# Altium PCB VFan2.PcbDoc
Units mm, origin at the board's own origin, x right, y up, seen from the top; angles counter-clockwise.
Board outline 80 x 87 mm, 2 copper layers (Top Layer, Bottom Layer), stack 1.571 mm thick; 61 components, 41 nets, 210 pads, 277 vias.
Unrouted connection lines stored in the file: 2.
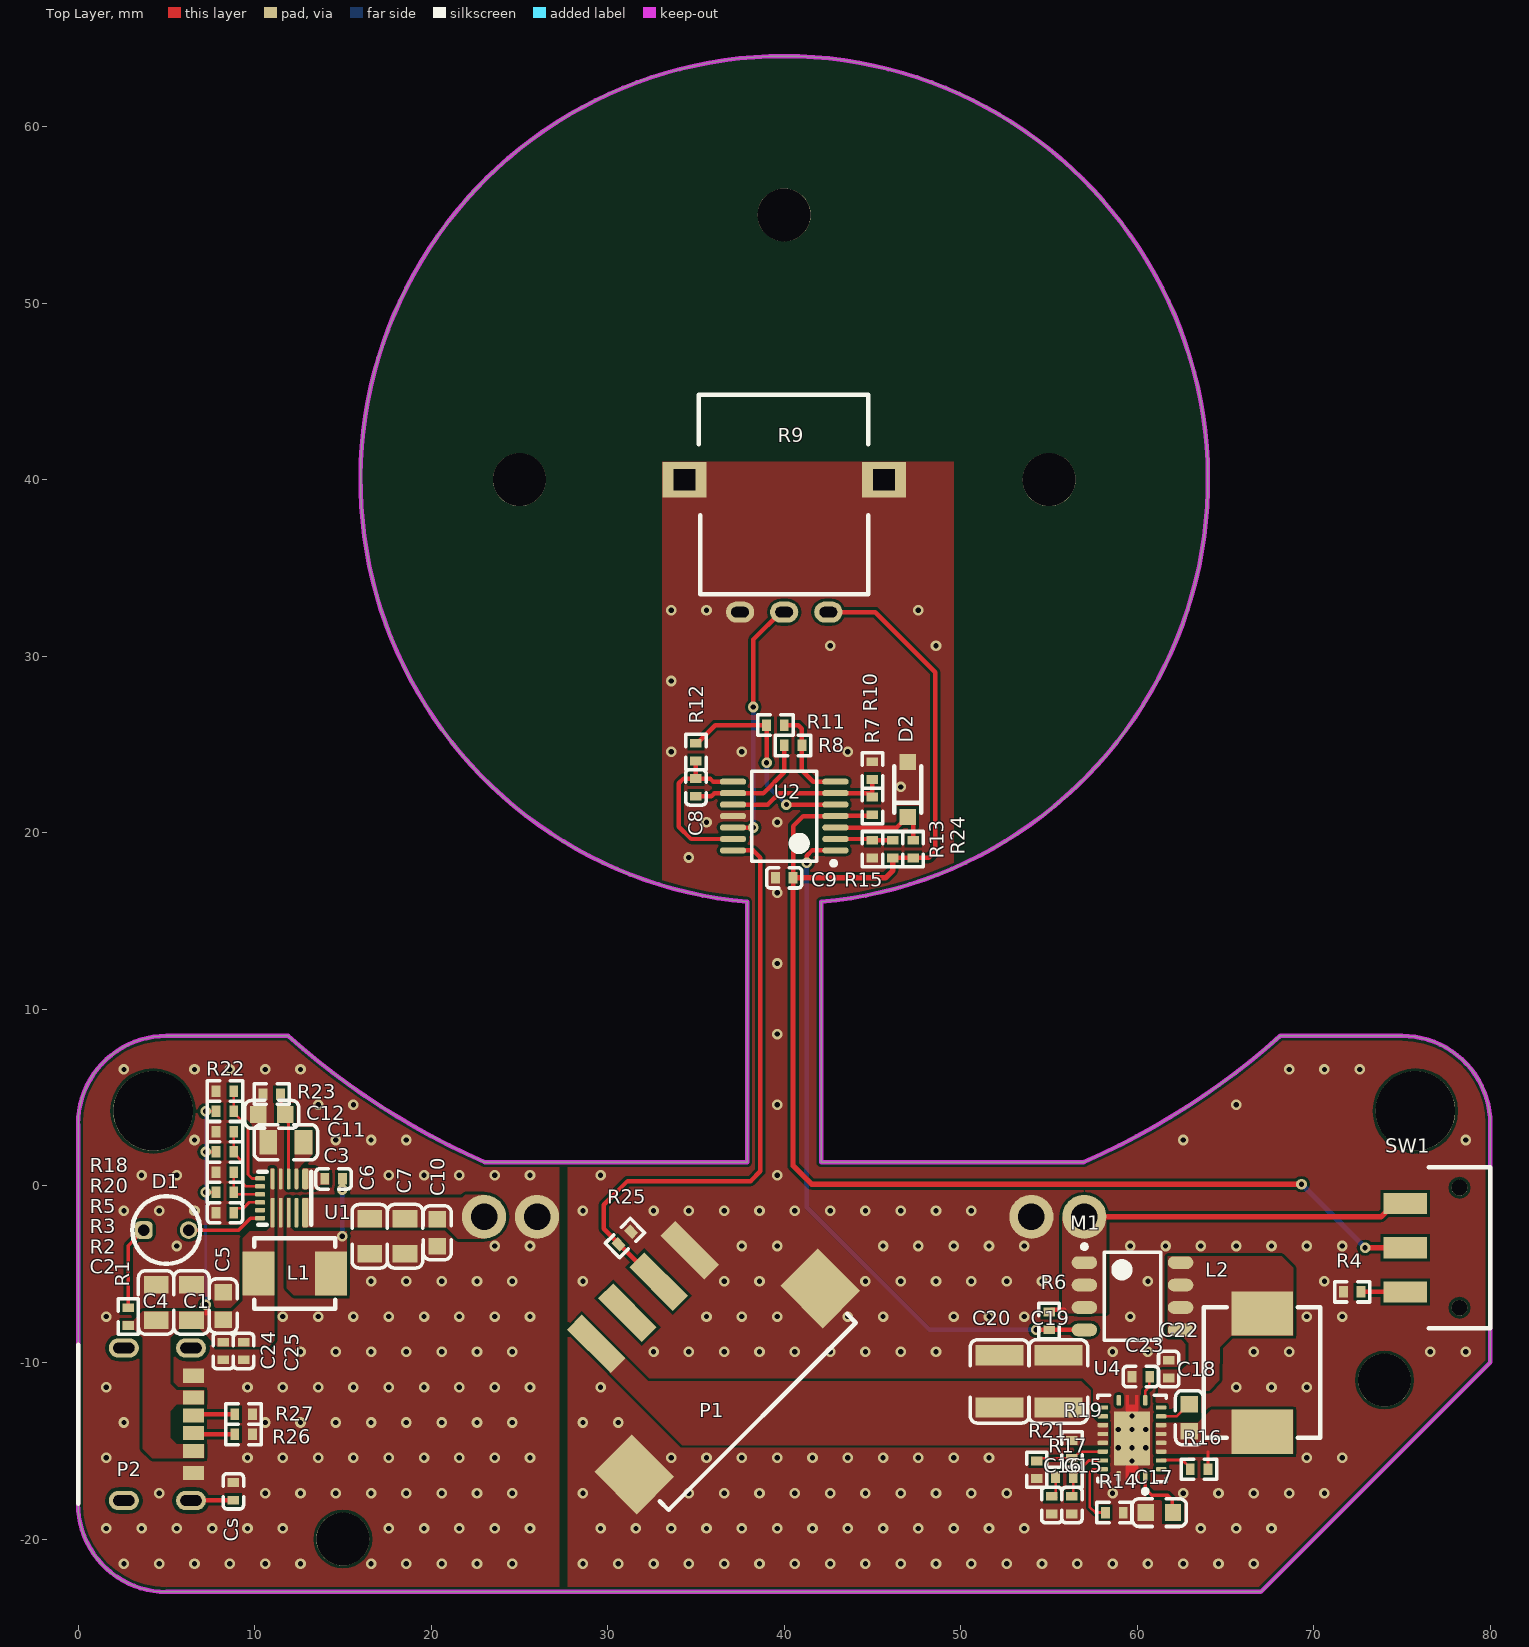
[diagram p0: Top Layer view]
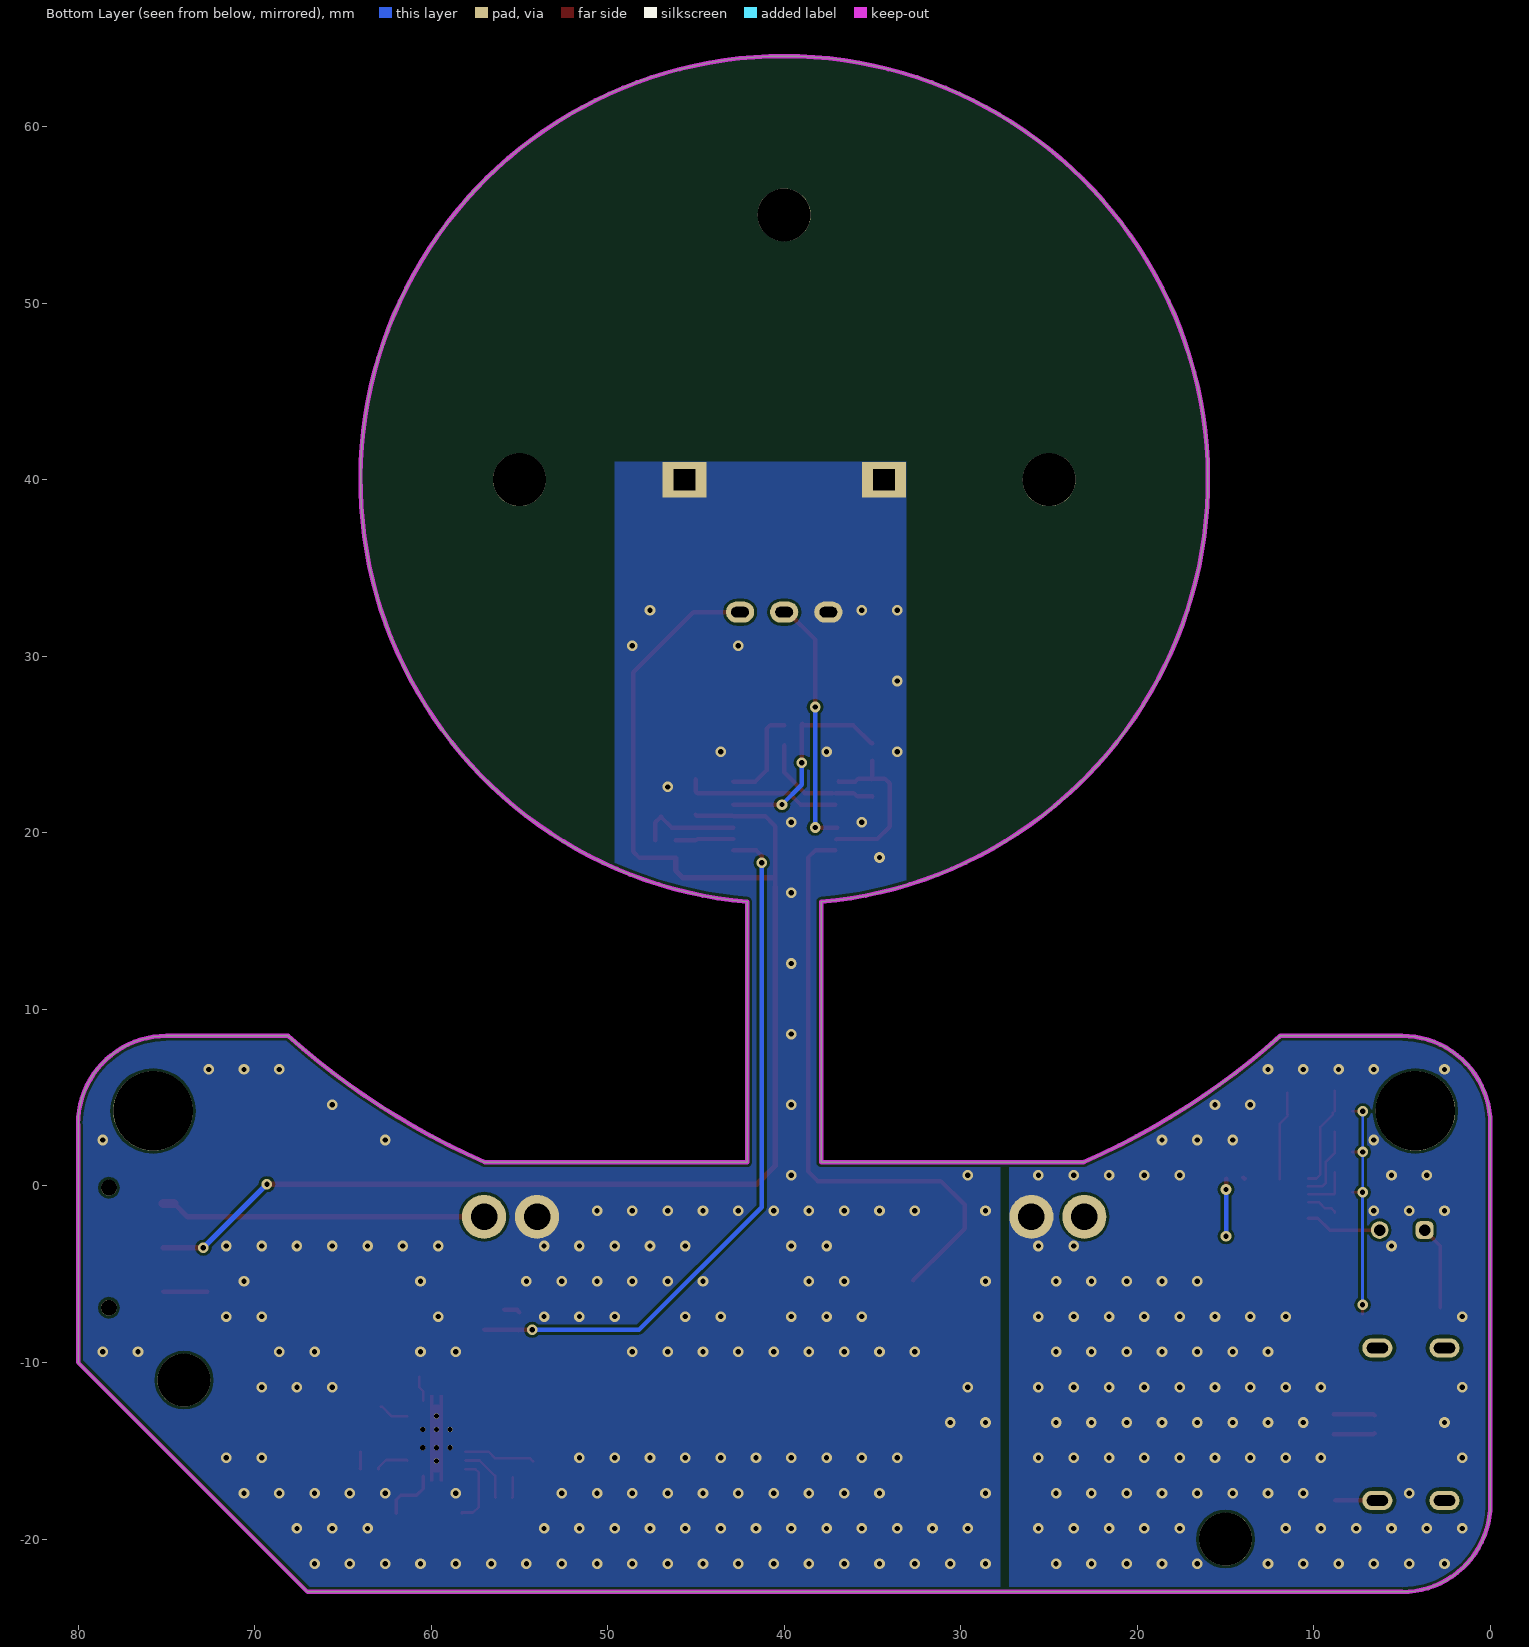
[diagram p1: Bottom Layer view, seen from below]
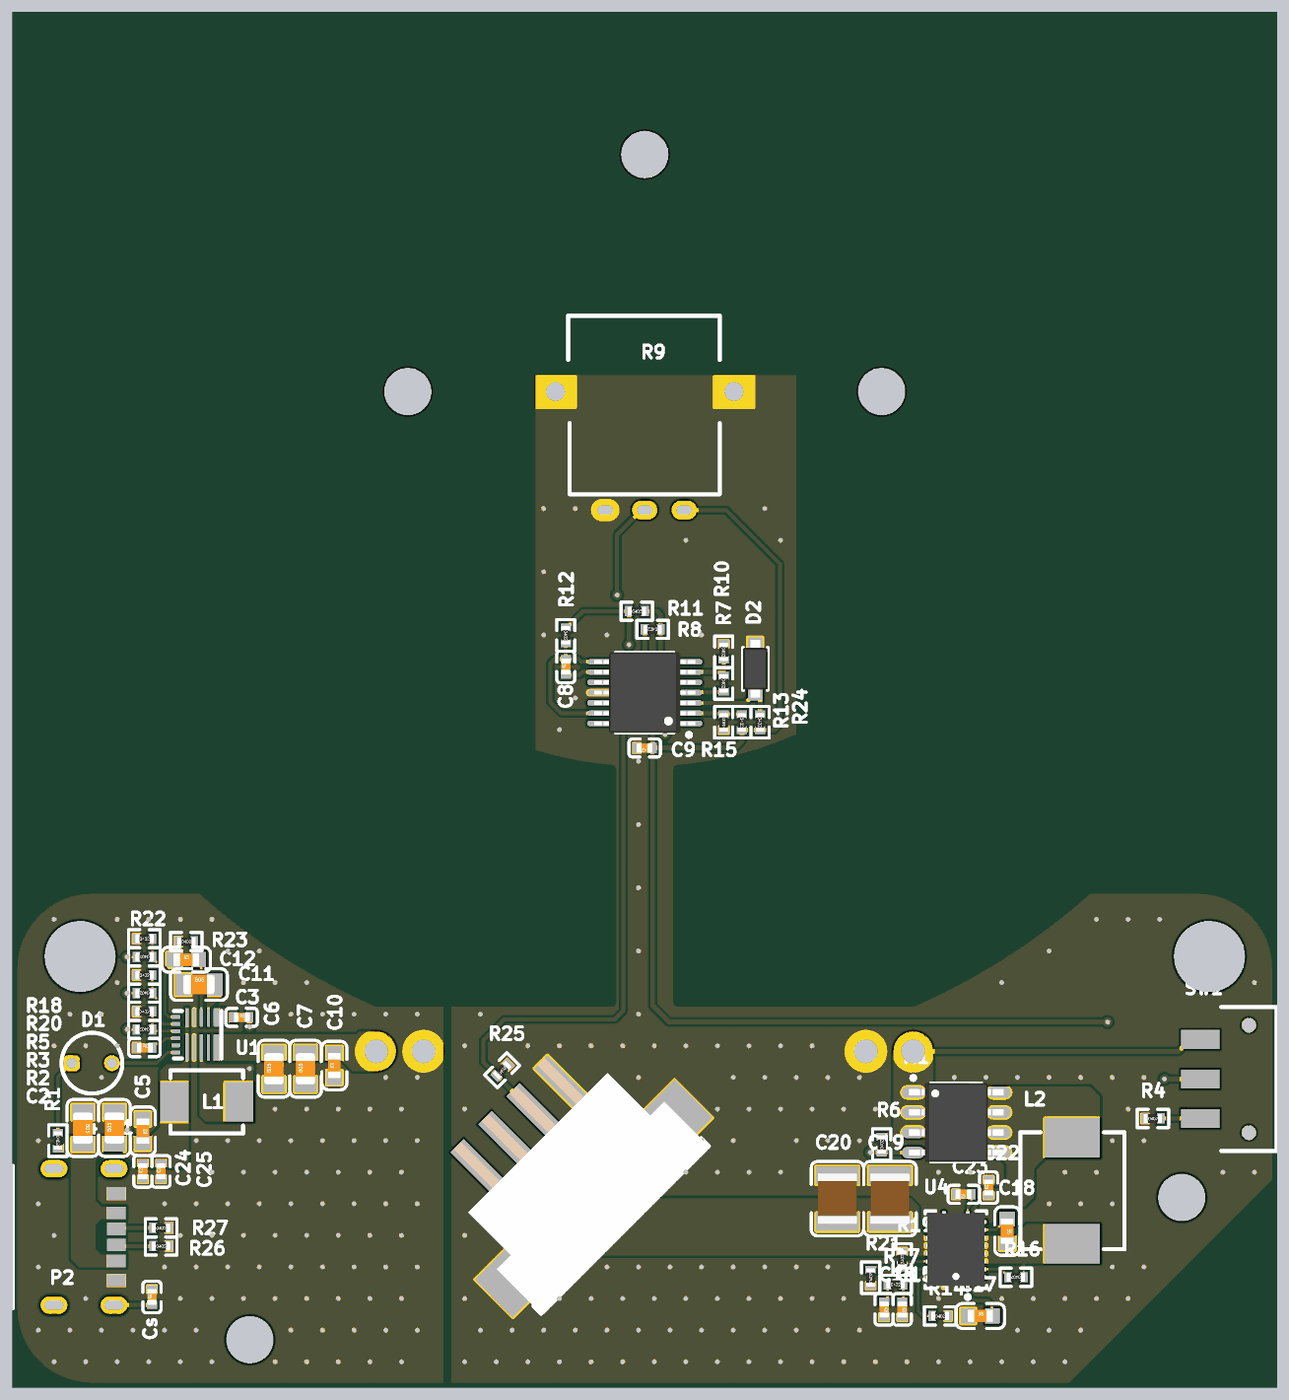
[diagram p2: 3D render of the assembled board from above, using the file's embedded part models]

## Layer stack, top to bottom
Top Solder: solder mask 0.0102, Solder Resist, Dk 3.5
Top Layer: signal copper 0.0356
Dielectric 1: dielectric 1.5, FR-4, Dk 4.8
Bottom Layer: signal copper 0.0356
Bottom Solder: solder mask 0.0102, Solder Resist, Dk 3.5

## Board outline
0,-18 ccw(c5,-18) 5,-23 67,-23 80,-10 80,3.5 ccw(c75,3.5) 75,8.5 68.097,8.5 cw(c40,40) 56.966,1.35 42.092,1.35 42.092,16.091 ccw(c40,40) 37.908,16.091 37.908,1.35 23.034,1.35 cw(c40,40) 11.903,8.5 5,8.5 ccw(c5,3.5) 0,3.5

## Design rules (kind name [scope] priority, off if disabled: settings)
Clearance [All] p1: gap=0.152 ignorepadtopadclearanceinfootprint=FALSE
HoleToHoleClearance [All] p1: gap=0.152 allowstackedmicrovias=TRUE
MinimumSolderMaskSliver [All] p1: minsoldermaskwidth=0.102
PolygonConnect [All] p1: connectstyle=Direct reliefconductorwidth=0.254 reliefentries=4 polygonreliefangle="90 Angle" airgapwidth=0.254
RoutingVias [All] p1: holewidth=0.3 width=0.6 viastyle="Through Hole" minholewidth=0.3 minwidth=0.6 maxholewidth=0.3 maxwidth=0.6
SilkToSilkClearance [All] p1: silktosilkclearance=0
SilkToSolderMaskClearance [IsPad] p1: minsilkscreentomaskgap=0 clearancetoexposedcopper=TRUE
SolderMaskExpansion [All] p1: expansion=0.102
Width [All] p1: maxlimit=2.54 minlimit=0.152 preferedwidth=0.254
26 further rules are at their usual default settings.

## Components (designator, comment, footprint, x,y, rotation, side; value= is the part's Value field where it differs from the comment)
C1 "2.2uF" SMC_0805 6.425,-6.6 r90 top
C2 "470nF" SMC_0402 8.325,-1.515 r0 top
C3 "100nF" SMC_0402 14.475,0.4 r0 top
C4 "10uF" SMC_0805 4.425,-6.6 r270 top
C5 "100nF" SMC_0603 8.225,-6.8 r270 top
C6 "22uF" SMC_0805 16.525,-2.85 r90 top
C7 "10uF" SMC_0805 18.525,-2.85 r90 top
C8 "1nF" SMC_0402 35,22.575 r90 top
C9 "100nF" SMC_0402 40,17.45 r180 top
C10 "100nF" SMC_0603 20.35,-2.65 r90 top
C11 "4.7uF" SMC_0805 11.775,2.475 r0 top
C12 "100nF" SMC_0603 10.975,4.05 r0 top
C15 "30pF" SMC_0402 56.3,-18.075 r270 top
C16 "100nF" SMC_0402 55.15,-18.075 r270 top
C17 "2.2uF" SMC_0603 61.25,-18.5 r0 top
C18 "2.2uF" SMC_0603 62.95,-13.125 r270 top
C19 "22uF" SMC_1210 55.525,-11.075 r270 top
C20 "22uF" SMC_1210 52.2,-11.075 r270 top
C22 "100nF" SMC_0402 61.775,-10.375 r90 top
C23 "100nF" SMC_0402 60.2,-10.8 r180 top
C24 "10nF" SMC_0402 8.225,-9.35 r90 top
C25 "1uF" SMC_0402 9.375,-9.35 r90 top
Cs "Comment" SMC_0402 8.8,-17.3 r90 top
D1 "LED_Red" THLED_3mm 5,-2.5 r0 top
D2 "Diode_Zener" SOD-123 47,22.45 r90 top
L1 "3.3uH" SML_4.1x4.6 12.275,-4.95 r180 top
L2 "2.2uH" SML_7.4x6.6 67.075,-10.575 r270 top
M1 "P-MOSFET" SOIC127P600X175-8N 59.725,-6.25 r0 top
P1 "XH2.5-4" XH2.54-4S 32,-6.3 r225 top
P2 "USB_TypeC_6P" USB_TypeC_6P 6.55,-13.5 r270 top
R1 "1K" SMR_0402 2.85,-7.4 r270 top
R2 "100K" SMR_0402 8.325,-0.365 r180 top
R3 "100K" SMR_0402 8.325,0.775 r0 top
R4 "10K" SMR_0402 72.175,-6 r0 top
R5 "100K" SMR_0402 8.325,1.925 r180 top
R6 "1K" SMR_0402 55,-7.65 r90 top
R7 "1K" SMR_0402 45,21.525 r270 top
R8 "10K" SMR_0402 40.5,24.95 r180 top
R9 "10K" RV09032 40,40 r0 top
R10 "1K" SMR_0402 45,23.525 r270 top
R11 "10K" SMR_0402 39.5,26.1 r0 top
R12 "10K" SMR_0402 35,24.575 r270 top
R13 "10K" SMR_0402 46.15,19.075 r270 top
R14 "160K" SMR_0402 58.7,-18.5 r0 top
R15 "47K" SMR_0402 45,19.075 r90 top
R16 "270K" SMR_0402 63.5,-16.05 r180 top
R17 "1K" SMR_0402 55.875,-16.5 r0 top
R18 "100K" SMR_0402 8.325,4.225 r180 top
R19 "180K" SMR_0402 56.3,-14.925 r90 top
R20 "10K" SMR_0402 8.325,3.075 r0 top
R21 "20K" SMR_0402 54.3,-16.075 r90 top
R22 "33K" SMR_0402 8.325,5.375 r0 top
R23 "8.2K" SMR_0402 10.975,5.2 r0 top
R24 "10K" SMR_0402 47.3,19.075 r270 top
R25 "1K" SMR_0402 30.975,-2.95 r45 top
R26 "5.1K" SMR_0402 9.375,-14.075 r0 top
R27 "5.1K" SMR_0402 9.375,-12.925 r0 top
SW1 "Switch" Switch 78.25,-3.5 r270 top
U1 "SY6982EQDC" SY6982EQDC 11.7,-0.7 r90 top
U2 "TL072" TSOP65P640X120-14N 40,20.95 r180 top
U4 "Buck Boost Converter" QFN50P350X450X100_HS-21N 59.7,-14.3 r180 top

## Footprints (in the part's own frame and the unit in brackets; to place one, negate y for a bottom-side part, rotate by r counter-clockwise, add the part's x,y. Pads: shape width x height; smd on the part's side, far side on the other; paste and mask are expansions set on the pad)
QFN50P350X450X100_HS-21N [mm] "QFN, 20-Leads, Body 3.50x4.50mm, Pitch 1.50mm/0.50mm, Thermal Pad 2.05x3.05mm, IPC Medium Density"
  rrect50% 0.24x0.6 smd: 1(-0.75,2.15) 10(-0.75,-2.15) 11(0.75,-2.15) 20(0.75,2.15)
  rrect50% 0.6x0.24 smd: 2(-1.65,1.75) 3(-1.65,1.25) 4(-1.65,0.75) 5(-1.65,0.25) 6(-1.65,-0.25) 7(-1.65,-0.75) 8(-1.65,-1.25) 9(-1.65,-1.75) 12(1.65,-1.75) 13(1.65,-1.25) 14(1.65,-0.75) 15(1.65,-0.25) 16(1.65,0.25) 17(1.65,0.75) 18(1.65,1.25) 19(1.65,1.75)
  round 0.3 hole 0.3: 21(-0.775,0.525) 21(-0.775,-0.508) 21(0,1.275) 21(0,0.525) 21(0,-0.508) 21(0,-1.27) 21(0.775,0.525) 21(0.775,-0.508)
  rrect5% 2.05x3.05 smd: 21(0,0)
  Top Layer region: -0.375,-1.925 0.375,-1.925 0.375,1.925 -0.375,1.925
  Top Layer region: -0.375,-2.45 -0.175,-2.45 -0.175,2.45 -0.375,2.45
  Top Layer region: 0.175,-2.45 0.375,-2.45 0.375,2.45 0.175,2.45
  silkscreen extent -1.95,-2.45 1.95,3.12, body extent -1.88,-2.38 1.88,2.38, height 1
RV09032 [mm]
  oval 1.6x1.2 hole 0.6 slot 1 at 0 deg: 1(-2.5,-7.5) 2(0,-7.5) 3(2.5,-7.5)
  rect 2.5x2 hole 1.2 square: ""(-5.65,0) ""(5.65,0)
  silkscreen extent -4.85,-6.5 4.75,4.8
SMC_0402 [mm] "SMT Capacitor, 0402 imperial"
  rect 0.5x0.65 smd mask+0.051: 1(-0.5,0) 2(0.5,0)
  silkscreen extent -1,-0.58 1,0.58, body extent -0.48,-0.3 0.52,0.3, height 0.2
SMC_0603 [mm] "SMT Capacitor, 0603 imperial"
  rect 0.93x0.98 smd: 1(-0.77,0) 2(0.77,0)
  silkscreen extent -1.54,-0.79 1.54,0.79, body extent -0.8,-0.4 0.8,0.4, height 0.3
SMC_0805 [mm] "SMT Capacitor, 0805 imperial"
  rect 1x1.4 smd: 1(-1,0) 2(1,0)
  silkscreen extent -1.8,-1 1.8,1, body extent -1,-0.62 1,0.63, height 0.77
SMC_1210 [mm] "SMT Capacitor, 1210 imperial"
  rect 1.16x2.72 smd: 1(-1.475,0) 2(1.475,0)
  silkscreen extent -2.36,-1.66 2.35,1.66, body extent -1.6,-1.25 1.6,1.25, height 1.3
SML_4.1x4.6 [mm]
  rect 1.8x2.5 smd: 1(-2.05,0) 2(2.05,0)
  silkscreen extent -2.3,-2 2.3,2
SML_7.4x6.6 [mm]
  rect 2.5x3.5 smd: 1(-3.35,0) 2(3.35,0)
  silkscreen extent -3.7,-3.3 3.7,3.3
SMR_0402 [mm] "SMT Resistor, 0402 imperial"
  rect 0.5x0.65 smd mask+0.051: 1(-0.5,0) 2(0.5,0)
  silkscreen extent -1,-0.58 1,0.58, body extent -0.57,-0.27 0.58,0.28, height 0.41
SOD-123 [mm] "SODFL, 2-Leads, Body 1.55x3.65mm, IPC Medium Density"
  rect 0.9x0.95 smd: A(1.553,0) K(-1.552,0)
  silkscreen extent -1.32,-0.77 1.33,0.77, body extent -1.83,-0.77 1.83,0.77, height 1.35
SOIC127P600X175-8N [mm] "SOIC, 8-Leads, Body 4.90x3.90mm, Pitch 1.27mm, IPC Medium Density"
  oval 1.45x0.72 smd: D(2.725,-1.905) D(2.725,-0.635) D(2.725,0.635) D(2.725,1.905) G(-2.725,-1.905) S(-2.725,-0.635) S(-2.725,0.635) S(-2.725,1.905)
  silkscreen extent -2.85,-2.5 1.6,2.94, body extent -3,-2.5 3,2.5, height 1.75
Switch [mm] "Single Pole Double Throw Switch"
  rect 1.2x2.45 smd: 1(0,-3.075) 2(-2.5,-3.075) 3(2.5,-3.075)
  round 0.9 hole 0.9: ""(-3.4,0) ""(3.4,0)
  silkscreen extent -4.55,-1.75 4.55,1.75
SY6982EQDC [mm]
  rrect50% 0.25x0.575 smd mask+0.051: 1(-1.125,1.388) 2(-0.675,1.388) 3(-0.225,1.388) 4(0.225,1.388) 5(0.675,1.388) 6(1.125,1.388)
  rrect50% 1.17x0.225 smd mask+0.051: 7(1.096,0.675)
  rrect50% 1.17x0.2 smd mask+0.051: 8(1.097,0.225) 9(1.096,-0.225) 10(1.097,-0.675)
  rrect50% 1.17x0.35 smd mask+0.051: 11(1.097,-1.175)
  rrect50% 1.68x0.35 smd mask+0.051: 12(-0.81,-1.175)
  rrect50% 1.68x0.2 smd mask+0.051: 13(-0.81,-0.675) 14(-0.81,-0.225) 15(-0.81,0.225)
  rrect50% 1.68x0.225 smd mask+0.051: 16(-0.81,0.675)
  silkscreen extent -1.5,-1.5 1.5,1.5
THLED_3mm [mm]
  rrect50% 1x1 hole 0.65: A(-1.27,0)
  round 1 hole 0.65: K(1.27,0)
  silkscreen extent -1.92,-1.92 1.92,1.92
TSOP65P640X120-14N [mm] "TSOP, 14-Leads, Body 5.00x4.40mm, Pitch 0.65mm, IPC Medium Density"
  oval 1.5x0.35 smd mask+0.07: 1(-2.9,1.95) 2(-2.9,1.3) 3(-2.9,0.65) 4(-2.9,0) 5(-2.9,-0.65) 6(-2.9,-1.3) 7(-2.9,-1.95) 8(2.9,-1.95) 9(2.9,-1.3) 10(2.9,-0.65) 11(2.9,0) 12(2.9,0.65) 13(2.9,1.3) 14(2.9,1.95)
  silkscreen extent -2.93,-2.55 1.85,2.8, body extent -3.2,-2.55 3.2,2.55, height 1.2
USB_TypeC_6P [mm]
  rect 0.8x1.2 smd mask+0.025: A5(-0.5,0) A9(1.52,0) A12(2.75,0) B5(0.5,0) B9(-1.52,0) B12(-2.75,0)
  oval 1.1x1.7 hole 1.2 slot 0.6 at 0 deg: ""(-4.32,-3.95) ""(-4.32,-0.15) ""(4.32,-0.15) ""(4.32,-3.95)
  silkscreen extent -4.5,-6.55 4.5,-6.55
XH2.54-4S [mm] "XH2.54 4 pin header, SMT"
  rect 1.2x3.5 smd: 1(-3.75,0) 2(-1.25,0) 3(1.25,0) 4(3.75,0)
  rect 3x3.4 smd: 5(-7.45,6.75) 6(7.45,6.75)
  silkscreen extent -7.5,8.85 7.5,9.55, body extent -7.5,-1.75 7.5,9.55, height 6.1

## Part data
C1 C2 C3 C4 C5 C6 C7 C8 C9 C10 C11 C12 C15 C16 C17 C18 C19 C20 C22 C23 C24 C25: library part "Cap Ceramic"
L1 L2: library part "Inductor_Ferrite SMT"
R1 R2 R3 R4 R5 R6 R7 R8 R10 R11 R12 R13 R14 R15 R16 R17 R18 R19 R20 R21 R22 R23 R24 R25 R26 R27: library part "Res SMT"
R9: library part "Res Var"
U2: library part OPA4376
U4: library part TPS61088

## Free pads (board coordinates)
  round 4.5 hole 4.5 unplated: ""(4.25,4.25) ""(75.75,4.25)
  round 3 hole 3 unplated: ""(15,-20) ""(25,40) ""(40,55) ""(55,40) ""(74,-11)
  round 2.5 hole 1.5: ""(23,-1.75) ""(26,-1.75) ""(54,-1.75) ""(57,-1.75)

## Via types
v1: diameter 0.6, hole 0.3, Top Layer to Bottom Layer, tented both sides, 277 vias

## Nets (pads, with @x,y where several pads share a name; then routed paths per layer and width w, separated by ;. In a path a pad name is that pad's centre, name@x,y a point inside that pad or via, vN(x,y) a via of type N, cw(c..) or ccw(c..) an arc to the next point about the centre after c; other vN are vias at no path point)
+12V: C19.2 C20.2 P1.4 R19.2 U4.14 U4.15 U4.16
EN: M1.G R6.1 U2.1 | length 40.2
  Top Layer w0.254: v1(41.275,18.313) 41.275,18.7 41.575,19 U2.1 ; v1(54.275,-8.15) R6.1 ; R6.1@55.075,-8.175 55.098,-8.152 56.997,-8.152 M1.G
  Bottom Layer w0.254: v1(41.275,18.313) 41.275,-1.2 48.225,-8.15 v1(54.275,-8.15)
GND: C9.2 C15.2 C16.2 C17.1 C19.1 C20.1 C22.2 C23.2 D2.A P1.1 P1.5 P1.6 pad.@54,-1.75 R4.1 R9. R9.1 R10.1 R14.2 R15.1 R21.1 R25.2 U2.11 U4.20 U4.21
  other v1: 28.6,-21.4 30.6,-21.4 32.6,-21.4 34.6,-21.4 36.6,-21.4 38.6,-21.4 40.6,-21.4 42.6,-21.4 44.6,-21.4 46.6,-21.4 48.6,-21.4 50.6,-21.4 52.6,-21.4 54.6,-21.4 56.6,-21.4 58.6,-21.4 60.6,-21.4 62.6,-21.4 64.6,-21.4 66.6,-21.4 29.6,-19.4 31.6,-19.4 33.6,-19.4 35.6,-19.4 37.6,-19.4 39.6,-19.4 41.6,-19.4 43.6,-19.4 45.6,-19.4 47.6,-19.4 49.6,-19.4 51.6,-19.4 53.6,-19.4 63.6,-19.4 65.6,-19.4 67.6,-19.4 28.6,-17.4 34.6,-17.4 36.6,-17.4 38.6,-17.4 40.6,-17.4 42.6,-17.4 44.6,-17.4 46.6,-17.4 48.6,-17.4 50.6,-17.4 52.6,-17.4 58.6,-17.4 62.6,-17.4 64.6,-17.4 66.6,-17.4 68.6,-17.4 70.6,-17.4 33.6,-15.4 35.6,-15.4 37.6,-15.4 39.6,-15.4 41.6,-15.4 43.6,-15.4 45.6,-15.4 47.6,-15.4 49.6,-15.4 51.6,-15.4 69.6,-15.4 71.6,-15.4 28.6,-13.4 30.6,-13.4 29.6,-11.4 65.6,-11.4 67.6,-11.4 69.6,-11.4 32.6,-9.4 34.6,-9.4 36.6,-9.4 38.6,-9.4 40.6,-9.4 42.6,-9.4 44.6,-9.4 46.6,-9.4 48.6,-9.4 58.6,-9.4 60.6,-9.4 66.6,-9.4 68.6,-9.4 76.6,-9.4 78.6,-9.4 35.6,-7.4 37.6,-7.4 39.6,-7.4 43.6,-7.4 45.6,-7.4 49.6,-7.4 51.6,-7.4 53.6,-7.4 59.6,-7.4 69.6,-7.4 71.6,-7.4 28.6,-5.4 36.6,-5.4 38.6,-5.4 44.6,-5.4 46.6,-5.4 48.6,-5.4 50.6,-5.4 52.6,-5.4 54.6,-5.4 60.6,-5.4 70.6,-5.4 37.6,-3.4 39.6,-3.4 45.6,-3.4 47.6,-3.4 49.6,-3.4 51.6,-3.4 53.6,-3.4 59.6,-3.4 61.6,-3.4 63.6,-3.4 65.6,-3.4 67.6,-3.4 69.6,-3.4 71.6,-3.4 28.6,-1.4 32.6,-1.4 34.6,-1.4 36.6,-1.4 38.6,-1.4 40.6,-1.4 42.6,-1.4 44.6,-1.4 46.6,-1.4 48.6,-1.4 50.6,-1.4 29.6,0.6 39.6,0.6 62.6,2.6 78.6,2.6 39.6,4.6 65.6,4.6 68.6,6.6 70.6,6.6 72.6,6.6 39.6,8.6 39.6,12.6 39.6,16.6 34.6,18.6 35.6,20.6 39.6,20.6 46.6,22.6 33.6,24.6 37.6,24.6 43.6,24.6 33.6,28.6 42.6,30.6 48.6,30.6 33.6,32.6 35.6,32.6 47.6,32.6
NetC2_2: C2.2 U1.3 | length 1.8
  Top Layer w0.152: C2.2 8.825,-1.44 8.999,-1.266 9.359,-1.266 9.7,-0.925 U1.3@10.3,-0.925
NetC3_1: C3.1 U1.11 | length 0.1
  Top Layer w0.254: C3.1@13.925,0.4 C3.1@14,0.475
NetC3_2: C3.2 L1.1 U1.14 | length 3.2
  Top Layer w0.254: v1(14.975,-0.2) C3.2
  Bottom Layer w0.254: v1(14.975,-2.85) v1(14.975,-0.2)
NetC8_1: C8.1 R8.2 U2.9 | length 6.9
  Top Layer w0.254: C8.1@35,22.05 35.025,22.075 35.875,22.075 36.05,22.25 U2.9 ; U2.9@37.275,22.25 38.825,22.25 40,23.425 R8.2
NetC8_2: C8.2 R12.2 U2.8 U2.13 | length 9.9
  Top Layer w0.254: R12.2 35,23.1 C8.2@35.025,23.075 ; C8.2@35.075,23.025 C8.2@35.025,23.075 ; U2.8@36.925,22.925 36.906,22.906 35.969,22.906 35.8,23.075 C8.2@35.025,23.075 ; U2.13@37.05,19.625 37.025,19.65 34.725,19.65 34.025,20.35 34.025,22.8 34.3,23.075 C8.2 C8.2@35.025,23.075
NetC11_2: C11.2 U1.10 U1.13
NetC12_2: C12.2 R23.2 U1.9 | length 5
  Top Layer w0.152: C12.2@11.475,4.05 11.5,4.075 R23.2@11.5,5.275 ; C12.2@11.5,3.95 11.925,3.525 U1.9
NetC15_1: C15.1 R17.2 U4.18 | length 3.2
  Top Layer w0.152: C15.1@56.35,-17.65 56.375,-17.625 R17.2 ; R17.2@56.375,-16.425 57.25,-15.55 U4.18
NetC16_1: C16.1 R17.1 | length 1.2
  Top Layer w0.152: R17.1 55.375,-17.625 C16.1@55.4,-17.65
NetC17_2: C17.2 U4.1 U4.2 | length 3.3
  Top Layer w0.203: U4.1 60.45,-17.15 60.825,-17.525 61.725,-17.525 61.975,-17.775 C17.2@61.975,-18.55
NetC18_1: C18.1 U4.8 | length 1.7
  Top Layer w0.152: U4.8 62.23,-13.05 62.78,-12.5 C18.1@62.85,-12.5
NetC18_2: C18.2 L2.2 R16.1 U4.4 U4.5 U4.6 U4.7 | length 1
  Top Layer w0.152: 64,-15.05 R16.1 R16.1@64.025,-16.025
NetC22_1: C22.1 L2.1 M1.D
NetC23_1: C23.1 U4.10 | length 1.4
  Top Layer w0.152: U4.10 60.45,-11.621 60.675,-11.397 C23.1@60.675,-10.8
NetD1_A: D1.A R1.1 | length 4.6
  Top Layer w0.203: R1.1 2.85,-3.38 3.475,-2.755 D1.A@3.475,-2.6
NetD1_K: D1.K U1.1 | length 4.3
  Top Layer w0.203: D1.K@6.35,-2.55 6.4,-2.5 9.1,-2.5 9.775,-1.825 U1.1
NetP2_A5: P2.A5 R27.1 | length 2.4
  Top Layer w0.254: P2.A5 6.625,-12.925 R27.1
NetP2_B5: P2.B5 R26.1 | length 2.4
  Top Layer w0.254: P2.B5 6.625,-14.075 R26.1
NetR2_1: R2.1 R3.2 U1.4 | length 2.7
  Top Layer w0.152: R3.2 8.825,-0.4 R2.1@8.85,-0.425 ; R2.1@8.85,-0.475 U1.4
NetR4_2: R4.2 SW1.3 | length 2.5
  Top Layer w0.254: R4.2 SW1.3
NetR5_1: R5.1 R20.2 U1.5 | length 4.2
  Top Layer w0.152: R20.2 R5.1 8.825,1.85 9.325,1.35 9.325,0.175 9.525,-0.025 U1.5@10.3,-0.025 ; U1.5 U1.5@10.35,-0.025
NetR7_1: R7.1 R10.2 U2.6 U2.10 | length 8.9
  Top Layer w0.254: U2.10 39.075,21.6 39.725,22.25 U2.6 44.925,22.25 45,22.325 R10.2
NetR8_1: R8.1 R11.2 U2.7 | length 5.6
  Top Layer w0.254: R11.2 40.8,26.1 41,25.9 R8.1 41,23.55 41.65,22.9 U2.7
NetR9_2: R9.2 U2.12 | length 14.3
  Top Layer w0.254: U2.12@37,20.3 U2.12 v1(38.25,20.3) ; v1(38.25,27.125) 38.25,30.95 39.8,32.5 R9.2
  Bottom Layer w0.254: v1(38.25,20.3) v1(38.25,27.125)
NetR11_1: R11.1 R12.1 U2.5 | length 12.2
  Top Layer w0.254: R12.1 35.075,25.075 36.1,26.1 38.9,26.1 R11.1@38.975,26.175 ; v1(39,23.975) R11.1 R11.1@39,26.15 ; v1(40.125,21.6) U2.5
  Bottom Layer w0.254: v1(39,23.975) 39,22.725 v1(40.125,21.6)
NetR13_1: R13.1 R15.2 U2.2 | length 3.3
  Top Layer w0.254: U2.2 44.925,19.65 R15.2 R13.1
NetR14_1: R14.1 U4.19 | length 3.9
  Top Layer w0.152: U4.19 57.475,-16.05 57.3,-16.225 57.3,-18.175 57.625,-18.5 58.238,-18.5 58.25,-18.488 R14.1@58.25,-18.55
NetR16_2: R16.2 U4.3 | length 1.9
  Top Layer w0.152: U4.3 61.379,-15.521 62.546,-15.521 62.975,-15.95 R16.2@62.975,-16.05
NetR18_1: R18.1 R22.2 U1.6 | length 5.7
  Top Layer w0.152: R18.1 R22.2 ; R18.1@8.925,4.15 8.925,4.05 9.63,3.345 9.63,0.645 9.85,0.425 U1.6
NetR19_1: R19.1 R21.2 U4.17 | length 4.1
  Top Layer w0.152: R21.2@54.225,-15.6 54.4,-15.425 R19.1 56.375,-15.425 56.75,-15.05 U4.17
P+: C6.2 C7.2 C10.2 pad.@23,-1.75 U1.12
P-: C1.2 C2.1 C4.1 C5.1 C6.1 C7.1 C10.1 C11.1 C12.1 C24.1 C25.1 Cs.2 P2.A12 P2.B12 pad.@26,-1.75 R3.1 R20.1 R22.1 R23.1 R26.2 R27.2 U1.8 U1.15
  other v1: 2.6,-21.4 4.6,-21.4 6.6,-21.4 8.6,-21.4 10.6,-21.4 12.6,-21.4 16.6,-21.4 18.6,-21.4 20.6,-21.4 22.6,-21.4 24.6,-21.4 1.6,-19.4 3.6,-19.4 5.6,-19.4 7.6,-19.4 9.6,-19.4 11.6,-19.4 17.6,-19.4 19.6,-19.4 21.6,-19.4 23.6,-19.4 25.6,-19.4 4.6,-17.4 10.6,-17.4 12.6,-17.4 14.6,-17.4 16.6,-17.4 18.6,-17.4 20.6,-17.4 22.6,-17.4 24.6,-17.4 1.6,-15.4 9.6,-15.4 11.6,-15.4 13.6,-15.4 15.6,-15.4 17.6,-15.4 19.6,-15.4 21.6,-15.4 23.6,-15.4 25.6,-15.4 2.6,-13.4 10.6,-13.4 12.6,-13.4 14.6,-13.4 16.6,-13.4 18.6,-13.4 20.6,-13.4 22.6,-13.4 24.6,-13.4 1.6,-11.4 9.6,-11.4 11.6,-11.4 13.6,-11.4 15.6,-11.4 17.6,-11.4 19.6,-11.4 21.6,-11.4 23.6,-11.4 25.6,-11.4 12.6,-9.4 14.6,-9.4 16.6,-9.4 18.6,-9.4 20.6,-9.4 22.6,-9.4 24.6,-9.4 1.6,-7.4 11.6,-7.4 13.6,-7.4 15.6,-7.4 17.6,-7.4 19.6,-7.4 21.6,-7.4 23.6,-7.4 25.6,-7.4 16.6,-5.4 18.6,-5.4 20.6,-5.4 22.6,-5.4 24.6,-5.4 5.6,-3.4 23.6,-3.4 25.6,-3.4 2.6,-1.4 4.6,-1.4 6.6,-1.4 3.6,0.6 5.6,0.6 17.6,0.6 19.6,0.6 21.6,0.6 23.6,0.6 25.6,0.6 6.6,2.6 14.6,2.6 16.6,2.6 18.6,2.6 13.6,4.6 15.6,4.6 2.6,6.6 6.6,6.6 8.6,6.6 10.6,6.6 12.6,6.6
shield: Cs.1 P2.@6.4,-17.82 | length 2.4
  Top Layer w0.254: P2.@6.4,-17.82 6.4,-17.8 Cs.1
SPD: P1.2 R25.1 U2.14 | length 34.6
  Top Layer w0.254: P1.2@32.7,-5.35 30.625,-3.275 29.775,-2.425 29.775,-1.075 31.125,0.275 38.1,0.275 38.65,0.825 38.65,18.6 38.25,19 U2.14
VBAT: C9.1 R7.2 R9.3 R13.2 R24.2 SW1.1 U2.4 | length 87.2
  Top Layer w0.254: 40.5,16.95 C9.1 40.5,20.375 41.075,20.95 U2.4 42.918,20.968 44.943,20.968 R7.2 ; R9.3@42.65,32.425 42.725,32.5 45.15,32.5 48.55,29.1 48.55,18.925 48.2,18.575 R24.2 R13.2
  Top Layer w0.305: 40.5,16.95 40.5,1.15 41.55,0.1 v1(69.3,0.1) ; C9.1@40.525,17.45 45.725,17.45 46.15,17.875 R13.2 ; v1(72.9,-3.5) SW1.1
  Bottom Layer w0.305: v1(69.3,0.1) v1(72.9,-3.5)
VBUS: C1.1 C4.2 C5.2 C24.2 C25.2 L1.2 P2.A9 P2.B9 R1.2 R2.2 R5.2 R18.2 U1.7 U1.16 | length 13.3
  Top Layer w0.152: v1(7.225,1.925) R5.2 ; v1(7.225,4.225) R18.2 ; v1(7.24,-6.735) 7.25,-6.745 7.25,-7.275 ; v1(7.24,-0.365) R2.2
  Bottom Layer w0.152: v1@7.2,1.95 v1(7.225,1.925) ; v1(7.225,4.225) v1(7.225,1.925) ; v1(7.24,-6.735) v1(7.24,-0.365) 7.225,-0.35 v1(7.225,1.925)
VCC: M1.S pad.@57,-1.75 R6.2 SW1.2 | length 19.4
  Top Layer w0.254: R6.2 55.123,-7.027 55.852,-7.027
  Top Layer w0.305: pad.@57,-1.75 73.8,-1.75 SW1.2@74.55,-1
  Top Layer w0.508: SW1.2@74.55,-1 SW1.2
VREF: D2.K R24.1 U2.3 | length 5.8
  Top Layer w0.254: U2.3 46.378,20.3 46.975,20.898 D2.K 47.3,20.598 R24.1
pads on no net: P1.3 P2.@2.6,-9.18 P2.@2.6,-17.82 P2.@6.4,-9.18 SW1. U1.2 U4.9 U4.11 U4.12 U4.13

## Polygon pours and split planes (outlines as drawn)
P- on Top Layer "Top Layer-P-" (solid, remove dead copper, pour order 46): 0,-23 27.25,-23 27.25,8.5 0,8.5
GND on Top Layer "Top Layer-GND" (solid, remove dead copper, pour order 40): 49.6,41.025 49.6,8.5 80,8.5 80,-23 27.75,-23 27.75,1.065 33.1,1.065 33.1,41.025
VCC on Top Layer "Top Layer-VCC" (solid, remove dead copper, pour order 38): 55.75,-1.75 58.25,-1.75 58.25,-7.25 58.2,-7.2 55.75,-7.2
NetC22_1 on Top Layer "Top Layer-VBAT 2" (solid, remove dead copper, pour order 8): 61.725,-3.975 68.175,-3.975 68.825,-4.625 68.825,-5.975 68.825,-8.475 65.325,-8.475 64.667,-9.133 64.633,-11.017 64.062,-11.588 62.212,-11.588 62.05,-11.75 62.05,-12.55 61.925,-12.675 61.05,-12.675 61.05,-11.875 61.2,-11.725 61.2,-10.6 61.375,-10.425 62.525,-10.425 62.9,-10.05 62.9,-8.9 62.688,-8.66 62.553,-8.525 61.725,-8.525
NetC3_1 on Top Layer "Top Layer-NetC3_1" (solid, remove dead copper, pour order 36): 12.7,-0.175 13.475,-0.175 13.725,0.075 14.225,0.075 14.225,0.725 13.725,0.725 13.45,1 12.7,1
no net on Top Layer "Top Layer-No Net" (solid, remove dead copper, pour order 28): 12.7,0.975
no net on Top Layer "Top Layer-No Net 1" (solid, remove dead copper, pour order 26): 12.675,0.975
P+ on Top Layer "Top Layer-P+" (solid, remove dead copper, pour order 24): 21.75,-0.675 21.925,-0.5 23,-0.5 23,-3 21.5,-3 20.85,-2.35 12.7,-2.35 12.7,-0.675
no net on Top Layer "Top Layer-No Net 2" (solid, remove dead copper, pour order 22): 12.7,-0.675
no net on Top Layer "Top Layer-No Net 3" (solid, remove dead copper, pour order 20): 12.7,-0.675
NetC11_2 on Top Layer "Top Layer-NetC11_2" (solid, remove dead copper, pour order 18): 12.275,-0.2 12.475,-0.2 12.475,0.975 12.8,1.3 13.275,1.775 13.275,3.05 12.275,3.05
NetC3_2 on Top Layer "Top Layer-NetC3_2" (solid, remove dead copper, pour order 16): 15.225,-2.575 15.225,-6.2 12.225,-6.2 11.825,-5.8 11.825,-0.675 12.025,-0.675 12.025,-2.35 12.25,-2.575
VBUS on Top Layer "Top Layer-VBUS" (solid, remove dead copper, pour order 0): 3.675,-8.6 3.225,-8.15 2.525,-8.15 2.525,-7.65 3.125,-7.65 3.675,-7.1 5.95,-7.1 8.725,-7.1 9.325,-6.5 9.325,-2.975 9.725,-2.575 10.675,-2.575 10.9,-2.35 10.9,1 11.125,1 11.125,-8.775 10.8,-9.1 7.9,-9.1 6.9,-8.1 5.725,-8.1 5.225,-8.6 5.225,-8.975 5.225,-11.2 5.6,-11.575 7.15,-11.575 7.15,-12.375 5.6,-12.375 5.225,-12.75 5.225,-14.25 5.6,-14.625 7.15,-14.625 7.15,-15.425 4.2,-15.425 3.675,-14.9
+12V on Top Layer "Top Layer-+12V" (solid, remove dead copper, pour order 14): 34.225,-14.675 30.1,-10.55 30.95,-9.7 32.3,-11.05 56.825,-11.05 57.35,-11.575 57.35,-13.025 57.75,-13.425 58.35,-13.425 58.35,-14.675
NetC18_2 on Top Layer "Top Layer-NetC18_2" (solid, remove dead copper, pour order 10): 61.05,-13.425 63.425,-13.425 64.175,-12.675 68.825,-12.675 68.825,-15.175 61.05,-15.175
GND on Bottom Layer "Bottom Layer-GND" (solid, remove dead copper, pour order 48): 49.6,41.025 49.6,8.5 80,8.5 80,-23 27.75,-23 27.75,1.065 33.1,1.065 33.1,41.025
P- on Bottom Layer "Bottom Layer-P-" (solid, remove dead copper, pour order 44): 0,-23 27.25,-23 27.25,8.5 0,8.5

## Keep-outs
Keep-Out Layer:
  the board outline again, w0.254